# Altium PCB NAVA0.01.PcbDoc
Units mm, origin at the board's own origin, x right, y up, seen from the top; angles counter-clockwise.
Board outline 82.68 x 103.89 mm, 2 copper layers (Top Layer, Bottom Layer); 18 components, 28 nets, 116 pads, 2 vias.
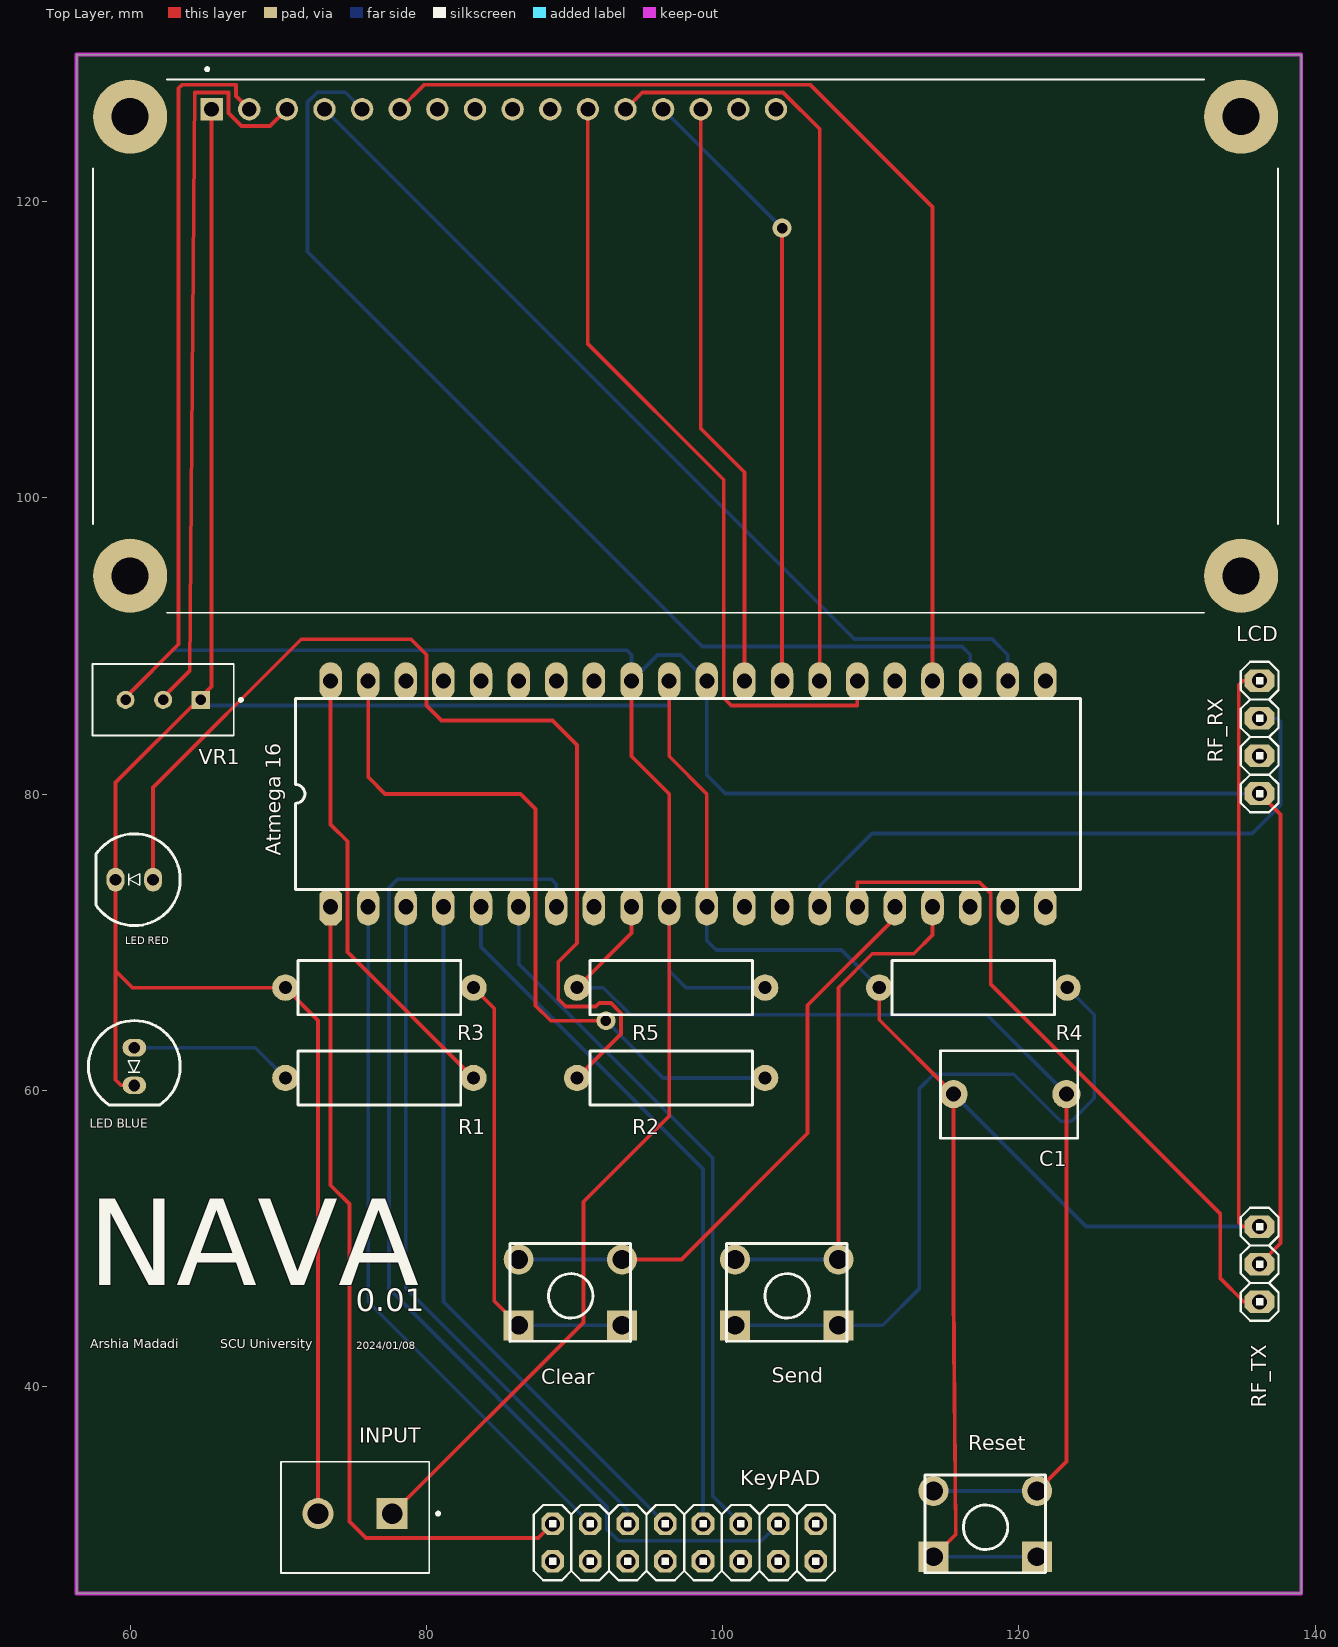
[diagram p0: Top Layer view]
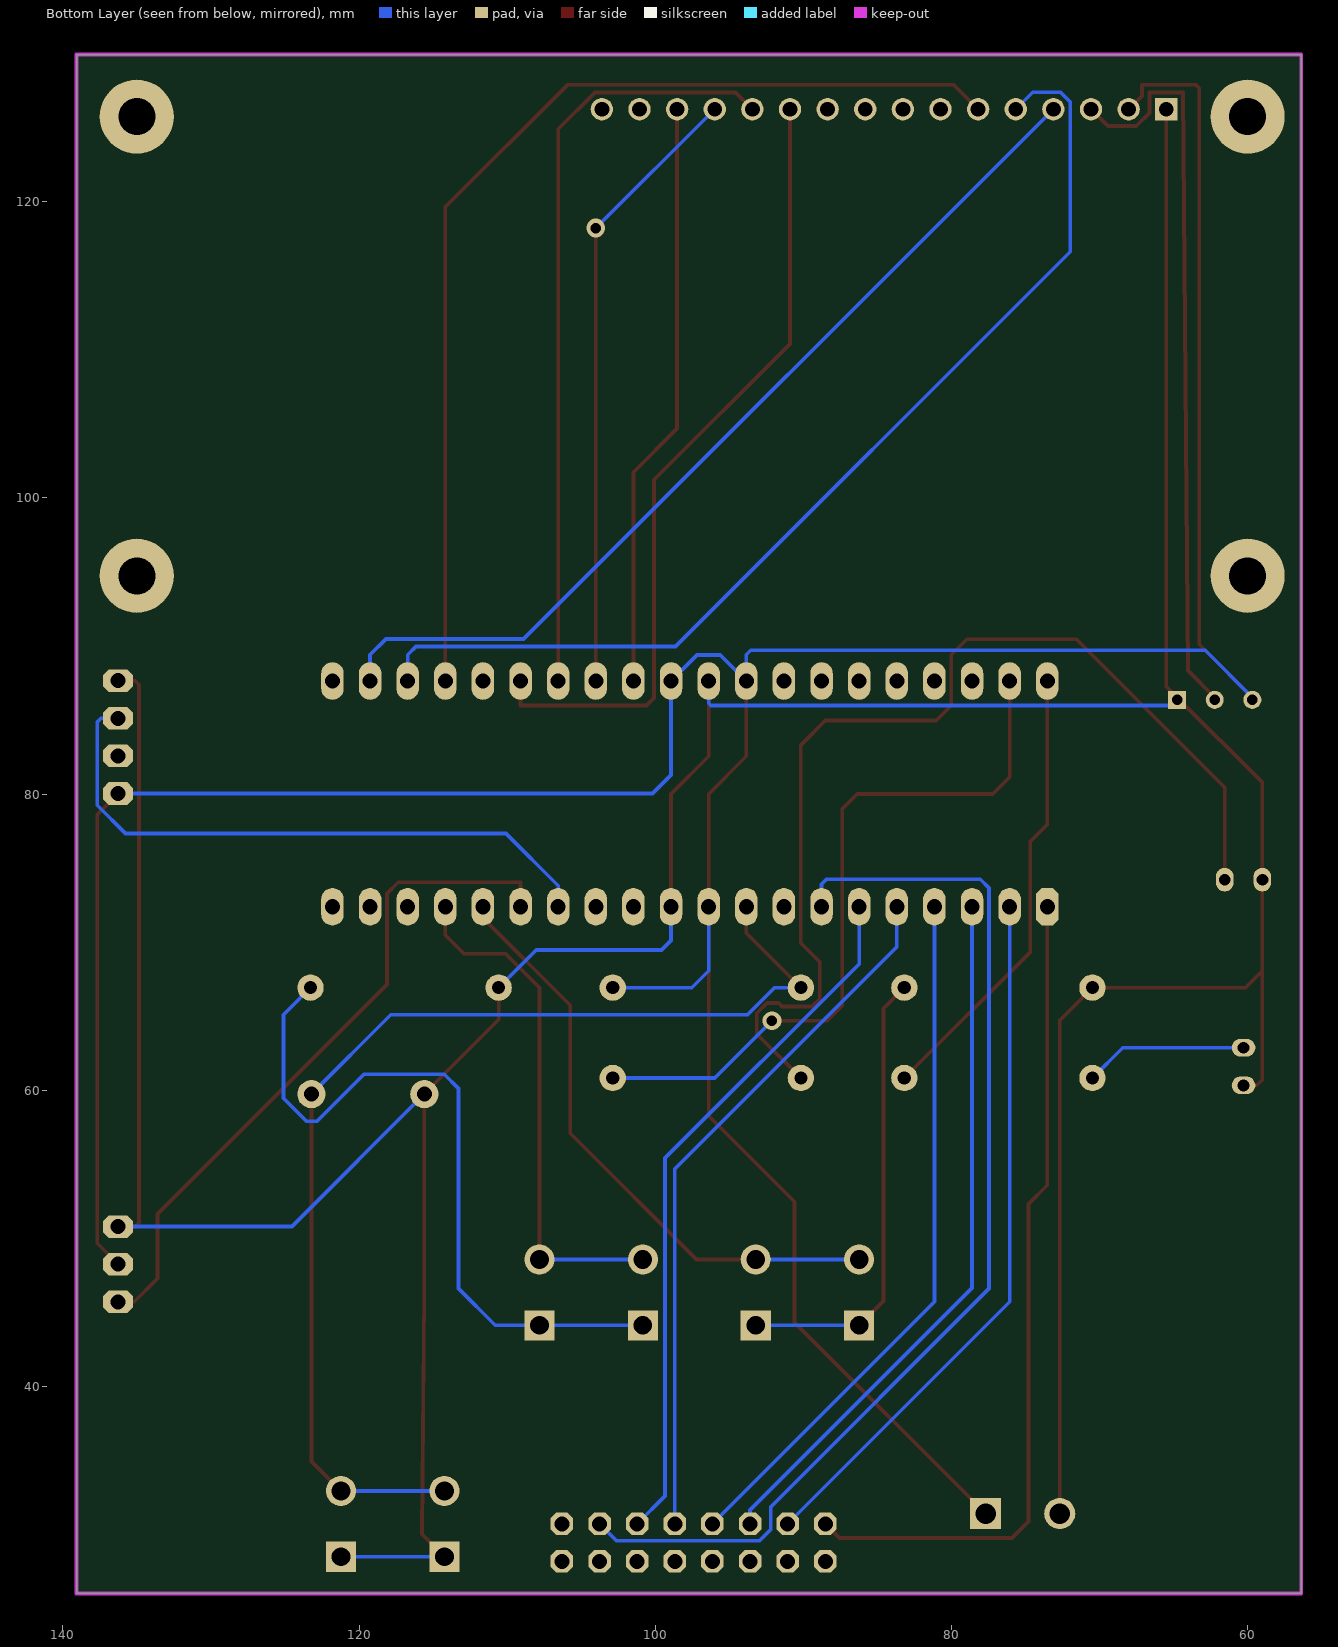
[diagram p1: Bottom Layer view, seen from below]
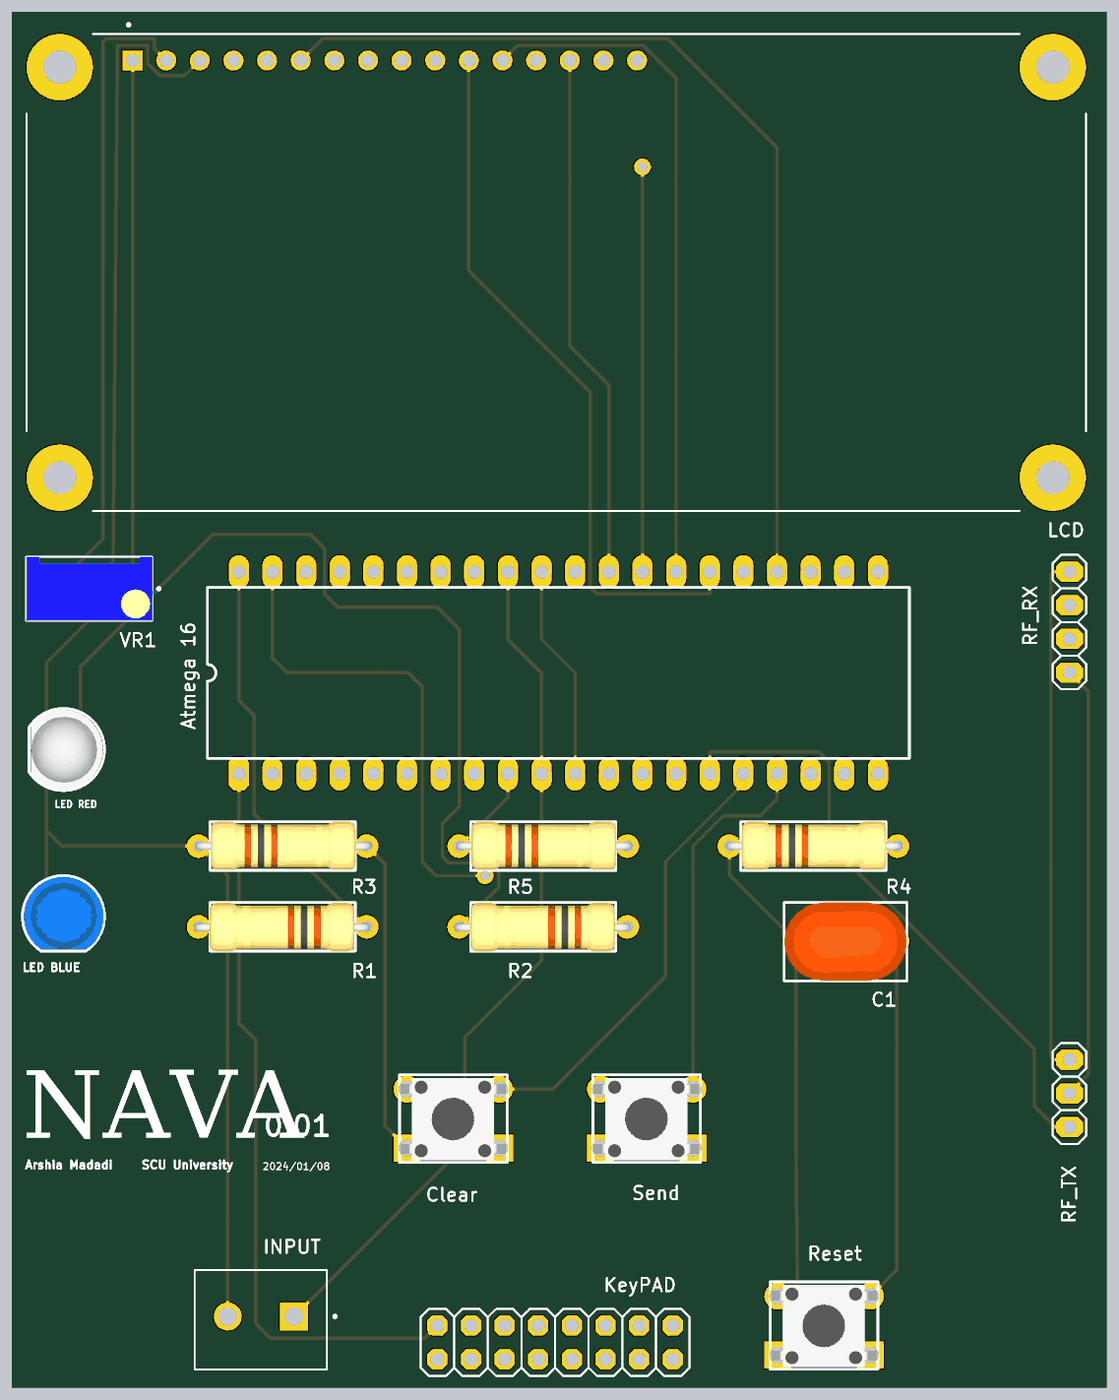
[diagram p2: 3D render of the assembled board from above, using the file's embedded part models]

## Layer stack, top to bottom
Top Solder: solder mask 0.0102, Solder Resist, Dk 3.5
Top Layer: signal copper 0.0356
Dielectric 1: dielectric 0.32, FR-4, Dk 4.8
Bottom Layer: signal copper 0.0356
Bottom Solder: solder mask 0.0102, Solder Resist, Dk 3.5

## Board outline
56.388,26.035 56.388,129.921 139.065,129.921 139.065,26.035

## Design rules (kind name [scope] priority, off if disabled: settings)
Clearance [All] p1: gap=0.254 ignorepadtopadclearanceinfootprint=FALSE except(0: Arc-Hole Track-Hole SMDPad-Hole THPad-Hole Via-Hole Fill-Hole Poly-Hole Region-Hole Text-Hole)
PolygonConnect [All] p1: connectstyle=Relief reliefconductorwidth=0.254 reliefentries=4 polygonreliefangle="90 Angle" airgapwidth=0.254
RoutingVias [All] p1: holewidth=0.711 width=1.27 viastyle="Through Hole" minholewidth=0.711 minwidth=1.27 maxholewidth=0.711 maxwidth=1.27
SolderMaskExpansion [All] p1: expansion=0.102 istentingtop=FALSE
Width [All] p1: maxlimit=0.254 minlimit=0.254 preferedwidth=0.254
30 further rules are at their usual default settings.

## Classes and differential pairs
component class NAVA0.01: "Atmega 16" C1 Clear IN INPUT LCD "LED BLUE" "LED RED" R1 R2 R3 R4 R5 Reset RF_RX RF_TX Send

## Components (designator, comment, footprint, x,y, rotation, side; value= is the part's Value field where it differs from the comment)
"Atmega 16" "ATmega16-16PI" My_40P6 97.663,80.01 r0 top
C1 "500nF" "Cap - 100nF - 400V" 123.209,59.742 r180 top
Clear "Switch PB" "Switch - Push to On" 89.725,46.355 r180 top
INPUT "KF301-2P" HANDSON_KF301-2P 75.193,31.419 r180 top
KeyPAD "Header 8X2" My_2X08 97.409,29.464 r0 top
LCD "LCD2X16" LCD_LCD2X16 97.503,110.236 r0 top
"LED BLUE" "ON-RECIEVE" LED5MM_BLUE 60.283,61.604 r270 top
"LED RED" "ON-SEND" LED5MM_RED 60.283,74.218 r180 top
R1 "2.2k" RES-(1/1) 83.185,60.833 r180 top
R2 "2.2K" RES-(1/1) 102.87,60.833 r180 top
R3 "220" RES-(1/1) 70.485,66.929 r0 top
R4 "220" RES-(1/1) 110.572,66.929 r0 top
R5 "1K" RES-(1/1) 90.17,66.929 r0 top
Reset "Switch PB" "Switch - Push to On" 117.729,30.734 r180 top
RF_RX "Header 4" My_1X04 136.259,83.845 r270 top
RF_TX "Header 3" My_1X03 136.259,48.26 r90 top
Send "Switch PB" "Switch - Push to On" 104.331,46.355 r180 top
VR1 "3296W-OT1-103" TRIM_3296W-OT1-103 62.23,86.36 r180 top

## Footprints (in the part's own frame and the unit in brackets; to place one, negate y for a bottom-side part, rotate by r counter-clockwise, add the part's x,y. Pads: shape width x height; smd on the part's side, far side on the other; paste and mask are expansions set on the pad)
"Cap - 100nF - 400V" [mil]
  round 75 hole 40: 1(0,0) 2(300,0)
  silkscreen extent -31,-115 334,118, body extent -31,-115 334,118, height 460
HANDSON_KF301-2P [mm]
  rect 2.1x2.1 hole 1.4: 1(-2.5,0)
  round 2.1 hole 1.4: 2(2.5,0)
  silkscreen extent -5.7,-3.5 5,4
LCD_LCD2X16 [mm]
  rect 1.508x1.508 hole 1: 1(-32,16)
  round 1.508 hole 1: 2(-29.46,16) 3(-26.92,16) 4(-24.38,16) 5(-21.84,16) 6(-19.3,16) 7(-16.76,16) 8(-14.22,16) 9(-11.68,16) 10(-9.14,16) 11(-6.6,16) 12(-4.06,16) 13(-1.52,16) 14(1.02,16) 15(3.56,16) 16(6.1,16)
  round 5 hole 2.5: S1(-37.5,15.5) S2(37.5,15.5) S3(37.5,-15.5) S4(-37.5,-15.5)
  silkscreen extent -40,-18 40,18.8
LED5MM_BLUE [mm] "LED 5MM THROUGH HOLE BLUE-Designer Abbas Basereh"
  oval 1.2x1.6 hole 0.8: 1(-1.27,0) 2(1.27,0)
  silkscreen extent -3.1,-3.1 2.6,3.1, body extent -2.99,-2.98 2.43,3.04, height 12.31
LED5MM_RED [mm] "LED 5MM THROUGH HOLE RED-Designer Abbas Basereh"
  oval 1.2x1.6 hole 0.8: 1(-1.27,0) 2(1.27,0)
  silkscreen extent -3.1,-3.1 2.6,3.1, body extent -2.97,-3 2.45,3.02, height 12.31
My_1X03 [mil]
  oct 60x80 hole 40: 1(-100,0) 2(0,0) 3(100,0)
  silkscreen extent -150,-50 150,50
My_1X04 [mil]
  oct 60x80 hole 40: 1(-150,0) 2(-50,0) 3(50,0) 4(150,0)
  silkscreen extent -200,-50 200,50
My_2X08 [mil]
  oct 60x60 hole 40: 1(-350,-50) 2(-350,50) 3(-250,-50) 4(-250,50) 5(-150,-50) 6(-150,50) 7(-50,-50) 8(-50,50) 9(50,-50) 10(50,50) 11(150,-50) 12(150,50) 13(250,-50) 14(250,50) 15(350,-50) 16(350,50)
  silkscreen extent -400,-100 400,100
My_40P6 [mil]
  oct 60x100 hole 40: 1(-950,-300)
  oval 60x100 hole 40: 2(-850,-300) 3(-750,-300) 4(-650,-300) 5(-550,-300) 6(-450,-300) 7(-350,-300) 8(-250,-300) 9(-150,-300) 10(-50,-300) 11(50,-300) 12(150,-300) 13(250,-300) 14(350,-300) 15(450,-300) 16(550,-300) 17(650,-300) 18(750,-300) 19(850,-300) 20(950,-300) 21(950,300) 22(850,300) 23(750,300) 24(650,300) 25(550,300) 26(450,300) 27(350,300) 28(250,300) 29(150,300) 30(50,300) 31(-50,300) 32(-150,300) 33(-250,300) 34(-350,300) 35(-450,300) 36(-550,300) 37(-650,300) 38(-750,300) 39(-850,300) 40(-950,300)
  silkscreen extent -1043,-254 1043,254
RES-(1/1) [mil]
  round 70 hole 35: 1(0,0) 2(500,0)
  silkscreen extent 34,-72 466,72, body extent -11,-71 514,73, height 151
"Switch - Push to On" [mil]
  rect 80x80 hole 50: 1(-137.5,87.5) 1(137.5,87.5)
  round 80 hole 50: 2(-137.5,-87.5) 2(137.5,-87.5)
  silkscreen extent -160,-130 160,130, body extent -155,-121 157,123, height 205
TRIM_3296W-OT1-103 [mm]
  rect 1.218x1.218 / inner round 1.218 / far side rect 1.218x1.218 hole 0.71: 1(-2.54,0)
  round 1.218 hole 0.71: 2(0,0) 3(2.54,0)
  silkscreen extent -5.35,-2.41 4.76,2.42, body extent -4.76,-2.41 4.76,2.42, height 11.55

## Part data
"Atmega 16": "AVR 16K Bytes of In-System Programmable Flash Memory", ComponentLink1Description="Manufacturer Link", ComponentLink1URL=http://www.atmel.com, ComponentLink2Description=Datasheet, ComponentLink2URL=http://www.atmel.com/dyn/resources/prod_documents/doc2466.pdf, DatasheetVersion=2466E-AVR-10/02, LatestRevisionDate=04-Mar-2005, LatestRevisionNote="Stylized 3D Model Added.", PackageDescription="DIP; 40 Leads; Row Spacing 15.24 mm; Pitch 2.54 mm", PackageReference=40P6, PackageVersion=Dec-1999, Published=17-Sep-2003, Publisher="Altium Limited"
C1: library part Cap-Bipolar, "Bipolar Capacitor", Voltage=100V, Adding Date=1387/12/20, Designer="Saeid Jorablo", Organazation=ControTec
Clear Reset Send: "Push Button Switch"
INPUT: "2 Pin Terminal Block 5mm Pitch", Package=None, Availability=Unavailable, MP=KF301-2P, Price=None
KeyPAD: "Header, 8-Pin, Dual row", LatestRevisionDate=17-Jul-2002, LatestRevisionNote="Re-released for DXP Platform.", Publisher="Altium Limited"
LCD: "Display; Display: LCD 2x16 characters (blue backlight)", Package=None, Availability=Unavailable, MP=LCD2X16, Price=None
"LED BLUE" "LED RED": library part "LED 5MM", "Light Emitting Diode", Data=16-12-2016, Designer="Abbas Basereh"
R1 R2 R3 R4 R5: library part "RES DIP PACKAGE", "TOTAL DIP RESISTOR PACK", Designer="Ali Hafizi"
RF_RX: "Header, 4-Pin", LatestRevisionDate=17-Jul-2002, LatestRevisionNote="Re-released for DXP Platform.", Publisher="Altium Limited"
RF_TX: "Header, 3-Pin", LatestRevisionDate=17-Jul-2002, LatestRevisionNote="Re-released for DXP Platform.", Publisher="Altium Limited"
VR1: "Potentiometers, multi, Resistors, trimmer, cermet, potentiometers, turn, sealed, Potentiometers and Accessories, Pass...", Package="SOT-23-5 Bourns", Availability="Not in stock", Check_prices=https://www.snapeda.com/parts/3296W-OT1-103/Bourns/view-part/?ref=eda, MF=Bourns, MP=3296W-OT1-103, Price=None, SnapEDA_Link=https://www.snapeda.com/parts/3296W-OT1-103/Bourns/view-part/?ref=snap

## Via types
v1: diameter 1.27, hole 0.711, Top Layer to Bottom Layer, 2 vias

## Nets (pads, with @x,y where several pads share a name; then routed paths per layer and width w, separated by ;. In a path a pad name is that pad's centre, name@x,y a point inside that pad or via, vN(x,y) a via of type N, cw(c..) or ccw(c..) an arc to the next point about the centre after c; other vN are vias at no path point)
+5: "Atmega 16.10" "Atmega 16.30" "Atmega 16.32" INPUT.1 LCD.2 R5.2 RF_RX.4 RF_TX.2 VR1.3 | length 245.9
  Top Layer w0.254: VR1.3@59.69,86.528 63.271,90.109 63.271,127.653 63.497,127.879 67.146,127.879 67.146,127.133 LCD.2 ; INPUT.1 90.602,44.328 90.602,52.476 96.393,58.268 96.393,72.39 96.393,80.01 93.853,82.55 93.853,87.63 ; RF_TX.2 137.668,49.669 137.668,78.626 RF_RX.4
  Bottom Layer w0.254: VR1.3@59.69,86.528 62.875,89.713 93.548,89.713 93.853,89.408 93.853,87.63 95.606,89.383 97.18,89.383 98.933,87.63 98.933,81.28 100.178,80.035 RF_RX.4 ; 96.393,72.39 96.393,68.072 97.536,66.929 R5.2
GND: "Atmega 16.11" "Atmega 16.31" "LED BLUE.2" "LED RED.2" C1.2 INPUT.2 LCD.1 R3.1 R4.1 Reset.1 RF_RX.1 RF_TX.3 VR1.1 | length 294.8
  Top Layer w0.254: 60.283,60.334 59.385,60.334 59.013,60.706 59.013,68.072 ; LCD.1 65.503,87.261 64.77,86.528 59.013,80.771 59.013,74.218 59.013,68.072 ; INPUT.2 72.693,64.721 R3.1 60.156,66.929 59.013,68.072 ; 96.393,87.63 96.393,82.55 98.933,80.01 98.933,72.39 ; R4.1 110.572,64.758 C1.2 115.589,46.412 115.748,30.023 Reset.1@114.236,28.511 ; RF_TX.3 135.103,50.8 134.849,51.054 134.849,87.376 135.128,87.655 RF_RX.1
  Bottom Layer w0.254: VR1.1@64.77,86.509 64.77,86.461 65.252,85.979 96.244,85.979 96.393,86.128 96.393,87.63 ; 98.933,72.39 98.933,70.104 99.568,69.469 108.032,69.469 R4.1 ; Reset.1@114.236,28.511 Reset.1@121.221,28.511 ; C1.2 124.531,50.8 RF_TX.3
"NetAtmega 16_1": "Atmega 16.1" KeyPAD.2 | length 56.6
  Top Layer w0.254: 73.533,72.39 73.533,53.594 74.803,52.324 74.803,30.886 75.921,29.769 87.554,29.769 KeyPAD.2
"NetAtmega 16_2": "Atmega 16.2" KeyPAD.4 | length 47.9
  Bottom Layer w0.254: 76.073,72.39 76.073,45.72 KeyPAD.4
"NetAtmega 16_3": "Atmega 16.3" KeyPAD.6 | length 47.9
  Bottom Layer w0.254: 78.613,72.39 78.613,46.656 93.599,31.67 KeyPAD.6
"NetAtmega 16_4": "Atmega 16.4" KeyPAD.8 | length 47.9
  Bottom Layer w0.254: 81.153,72.39 81.153,45.72 KeyPAD.8
"NetAtmega 16_5": "Atmega 16.5" KeyPAD.10 | length 47.9
  Bottom Layer w0.254: 83.693,72.39 83.693,69.672 98.679,54.686 KeyPAD.10
"NetAtmega 16_6": "Atmega 16.6" KeyPAD.12 | length 47.9
  Bottom Layer w0.254: 86.233,72.39 86.233,68.529 99.339,55.423 99.339,32.614 KeyPAD.12
"NetAtmega 16_7": "Atmega 16.7" KeyPAD.14 | length 75
  Bottom Layer w0.254: 88.773,72.39 88.773,73.914 88.443,74.244 78.054,74.244 77.47,73.66 77.47,46.609 92.202,31.877 92.202,30.353 92.964,29.591 102.616,29.591 KeyPAD.14
"NetAtmega 16_9": "Atmega 16.9" C1.1 R5.1 Reset.2 | length 77.6
  Top Layer w0.254: R5.1 93.853,70.612 93.853,72.39 ; Reset.2@121.221,32.956 123.209,34.944 C1.1
  Bottom Layer w0.254: R5.1 91.949,66.929 93.778,65.1 117.851,65.1 C1.1 ; Reset.2@114.236,32.956 Reset.2@121.221,32.956
"NetAtmega 16_14": "Atmega 16.14" RF_RX.2 | length 41.9
  Bottom Layer w0.254: 106.553,72.39 106.553,73.812 110.084,77.343 135.763,77.343 137.668,79.248 137.668,84.861 137.414,85.115 RF_RX.2
"NetAtmega 16_15": "Atmega 16.15" RF_TX.1 | length 46.7
  Top Layer w0.254: 109.093,72.39 109.093,74.041 117.348,74.041 118.11,73.279 118.11,67.132 133.604,51.638 133.604,47.295 135.179,45.72 RF_TX.1
"NetAtmega 16_16": "Atmega 16.16" Clear.2 | length 40.8
  Top Layer w0.254: Clear.2@93.218,48.578 97.219,48.578 105.74,57.099 105.74,65.735 111.633,71.628 111.633,72.39
  Bottom Layer w0.254: Clear.2@86.233,48.578 Clear.2@93.218,48.578
"NetAtmega 16_17": "Atmega 16.17" Send.2 | length 35.1
  Top Layer w0.254: Send.2@107.823,48.578 107.823,66.929 110.109,69.215 112.903,69.215 114.173,70.485 114.173,72.39
  Bottom Layer w0.254: Send.2@100.838,48.578 Send.2@107.823,48.578
"NetAtmega 16_22": "Atmega 16.22" LCD.4 | length 63.2
  Bottom Layer w0.254: LCD.4 108.884,90.475 118.186,90.475 119.253,89.408 119.253,87.63
"NetAtmega 16_23": "Atmega 16.23" LCD.5 | length 72.3
  Bottom Layer w0.254: LCD.5 74.518,127.381 72.644,127.381 71.984,126.721 71.984,116.611 98.628,89.967 116.154,89.967 116.713,89.408 116.713,87.63
"NetAtmega 16_24": "Atmega 16.24" LCD.6 | length 72.1
  Top Layer w0.254: LCD.6 79.846,127.879 105.928,127.879 114.173,119.634 114.173,87.63
"NetAtmega 16_26": "Atmega 16.26" LCD.11 | length 54.4
  Top Layer w0.254: LCD.11 90.903,110.392 100.076,101.219 100.076,86.487 100.584,85.979 109.093,85.979 109.093,87.63
"NetAtmega 16_27": "Atmega 16.27" LCD.12 | length 51.9
  Top Layer w0.254: LCD.12 94.578,127.371 104.073,127.371 106.553,124.891 106.553,87.63
"NetAtmega 16_28": "Atmega 16.28" LCD.13 | length 41.9
  Top Layer w0.254: 104.013,87.63 v1(104.013,118.206)
  Bottom Layer w0.254: LCD.13 v1(104.013,118.206)
"NetAtmega 16_29": "Atmega 16.29" LCD.14 | length 39.8
  Top Layer w0.254: LCD.14 98.523,104.677 101.473,101.727 101.473,87.63
"NetAtmega 16_39": "Atmega 16.39" R2.1 | length 49.5
  Top Layer w0.254: 76.073,87.63 76.073,81.153 77.216,80.01 86.36,80.01 87.376,78.994 87.376,65.71 88.392,64.694 v1(92.126,64.694)
  Bottom Layer w0.254: v1(92.126,64.694) 95.987,60.833 R2.1
"NetAtmega 16_40": "Atmega 16.40" R1.1 | length 30.8
  Top Layer w0.254: 73.533,87.63 73.533,77.953 74.676,76.81 74.676,69.342 R1.1
NetClear_1: Clear.1 R3.2 | length 31
  Top Layer w0.254: R3.2 84.582,65.532 84.582,45.784 Clear.1@86.233,44.133
  Bottom Layer w0.254: Clear.1@86.233,44.133 Clear.1@93.218,44.133
NetLCD_3: LCD.3 VR1.2 | length 50
  Top Layer w0.254: VR1.2@62.23,86.528 64.033,88.331 64.364,127.371 66.638,127.371 66.638,125.984 67.527,125.095 69.442,125.095 LCD.3
"NetLED BLUE_1": "LED BLUE.1" R1.2 | length 11
  Bottom Layer w0.254: 60.283,62.874 68.444,62.874 R1.2
"NetLED RED_1": "LED RED.1" R2.2 | length 72.1
  Top Layer w0.254: 61.553,74.218 61.553,80.451 71.552,90.449 78.969,90.449 80.01,89.408 80.01,85.979 81.026,84.963 88.519,84.963 90.17,83.312 90.17,69.926 88.9,68.656 88.9,66.167 89.408,65.659 91.44,65.659 91.669,65.888 92.456,65.888 93.142,65.202 93.142,63.805 R2.2
NetR4_2: R4.2 Send.1 | length 49.4
  Bottom Layer w0.254: Send.1@100.838,44.133 107.823,44.133 110.808,44.133 113.284,46.609 113.284,60.122 114.249,61.087 119.659,61.087 122.834,57.912 123.546,57.912 125.095,59.461 125.095,65.106 R4.2
pads on no net: "Atmega 16.8" "Atmega 16.12" "Atmega 16.13" "Atmega 16.18" "Atmega 16.19" "Atmega 16.20" "Atmega 16.21" "Atmega 16.25" "Atmega 16.33" "Atmega 16.34" "Atmega 16.35" "Atmega 16.36" "Atmega 16.37" "Atmega 16.38" KeyPAD.1 KeyPAD.3 KeyPAD.5 KeyPAD.7 KeyPAD.9 KeyPAD.11 KeyPAD.13 KeyPAD.15 KeyPAD.16 LCD.7 LCD.8 LCD.9 LCD.10 LCD.15 LCD.16 LCD.S1 LCD.S2 LCD.S3 LCD.S4 RF_RX.3

## Keep-outs
Keep-Out Layer:
  the board outline again, w0.254

## Silkscreen, mask and mechanical layers (free items; w line width, h text height)
Top Overlay:
  text "0.01" at 75.248,45.085 h1.52
  text "NAVA" at 57.147,44.915 h10
  text "Arshia Madadi" at 57.301,42.572 h0.62
  text "SCU University" at 66.093,42.572 h0.62
  text "2024/01/08" at 75.266,42.502 h0.52